# Altium PCB PCB2.PcbDoc
Units mm, origin at the board's own origin, x right, y up, seen from the top; angles counter-clockwise.
Board outline 66 x 55 mm, 2 copper layers (Top Layer, Bottom Layer); 27 components, 41 nets, 135 pads, 0 vias.
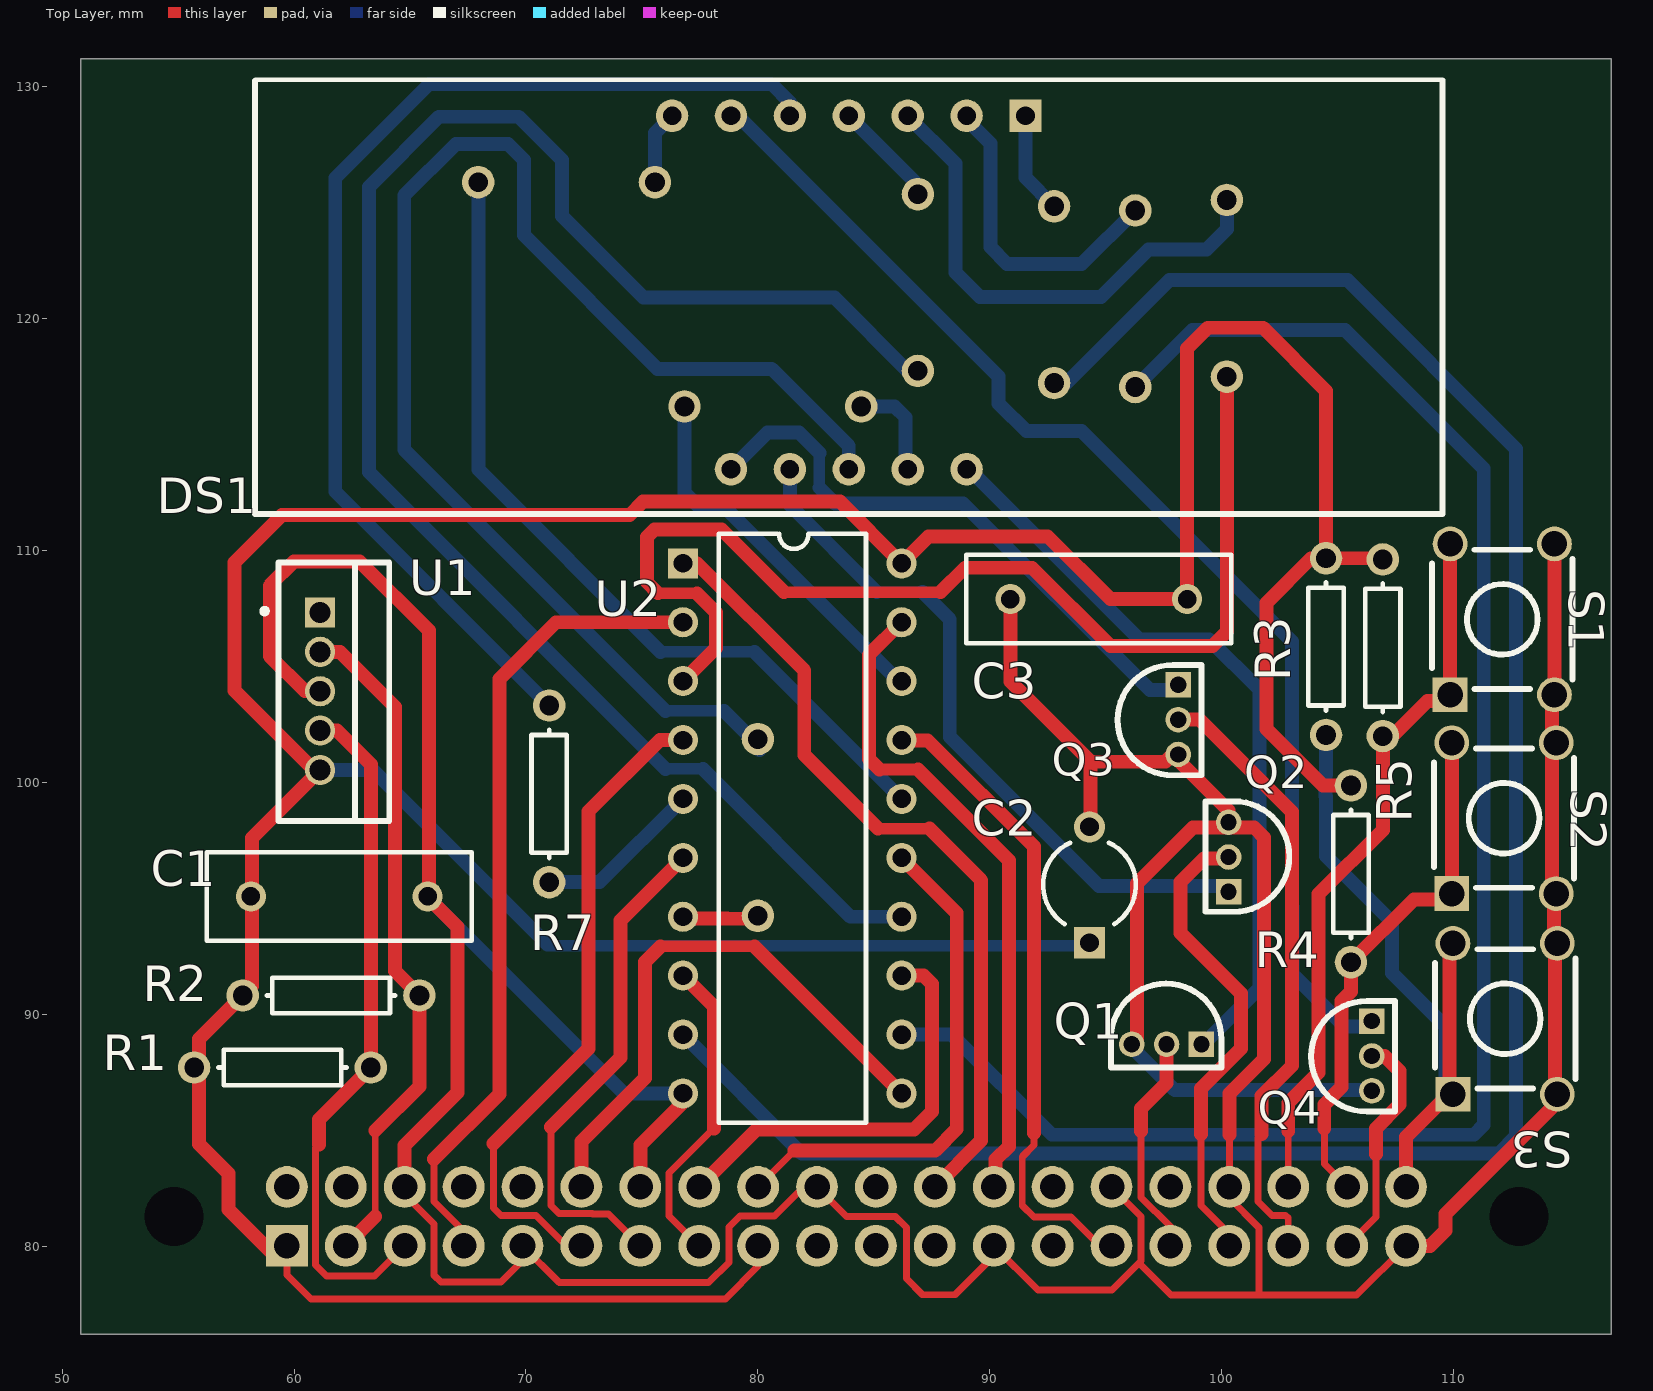
[diagram p0: Top Layer view]
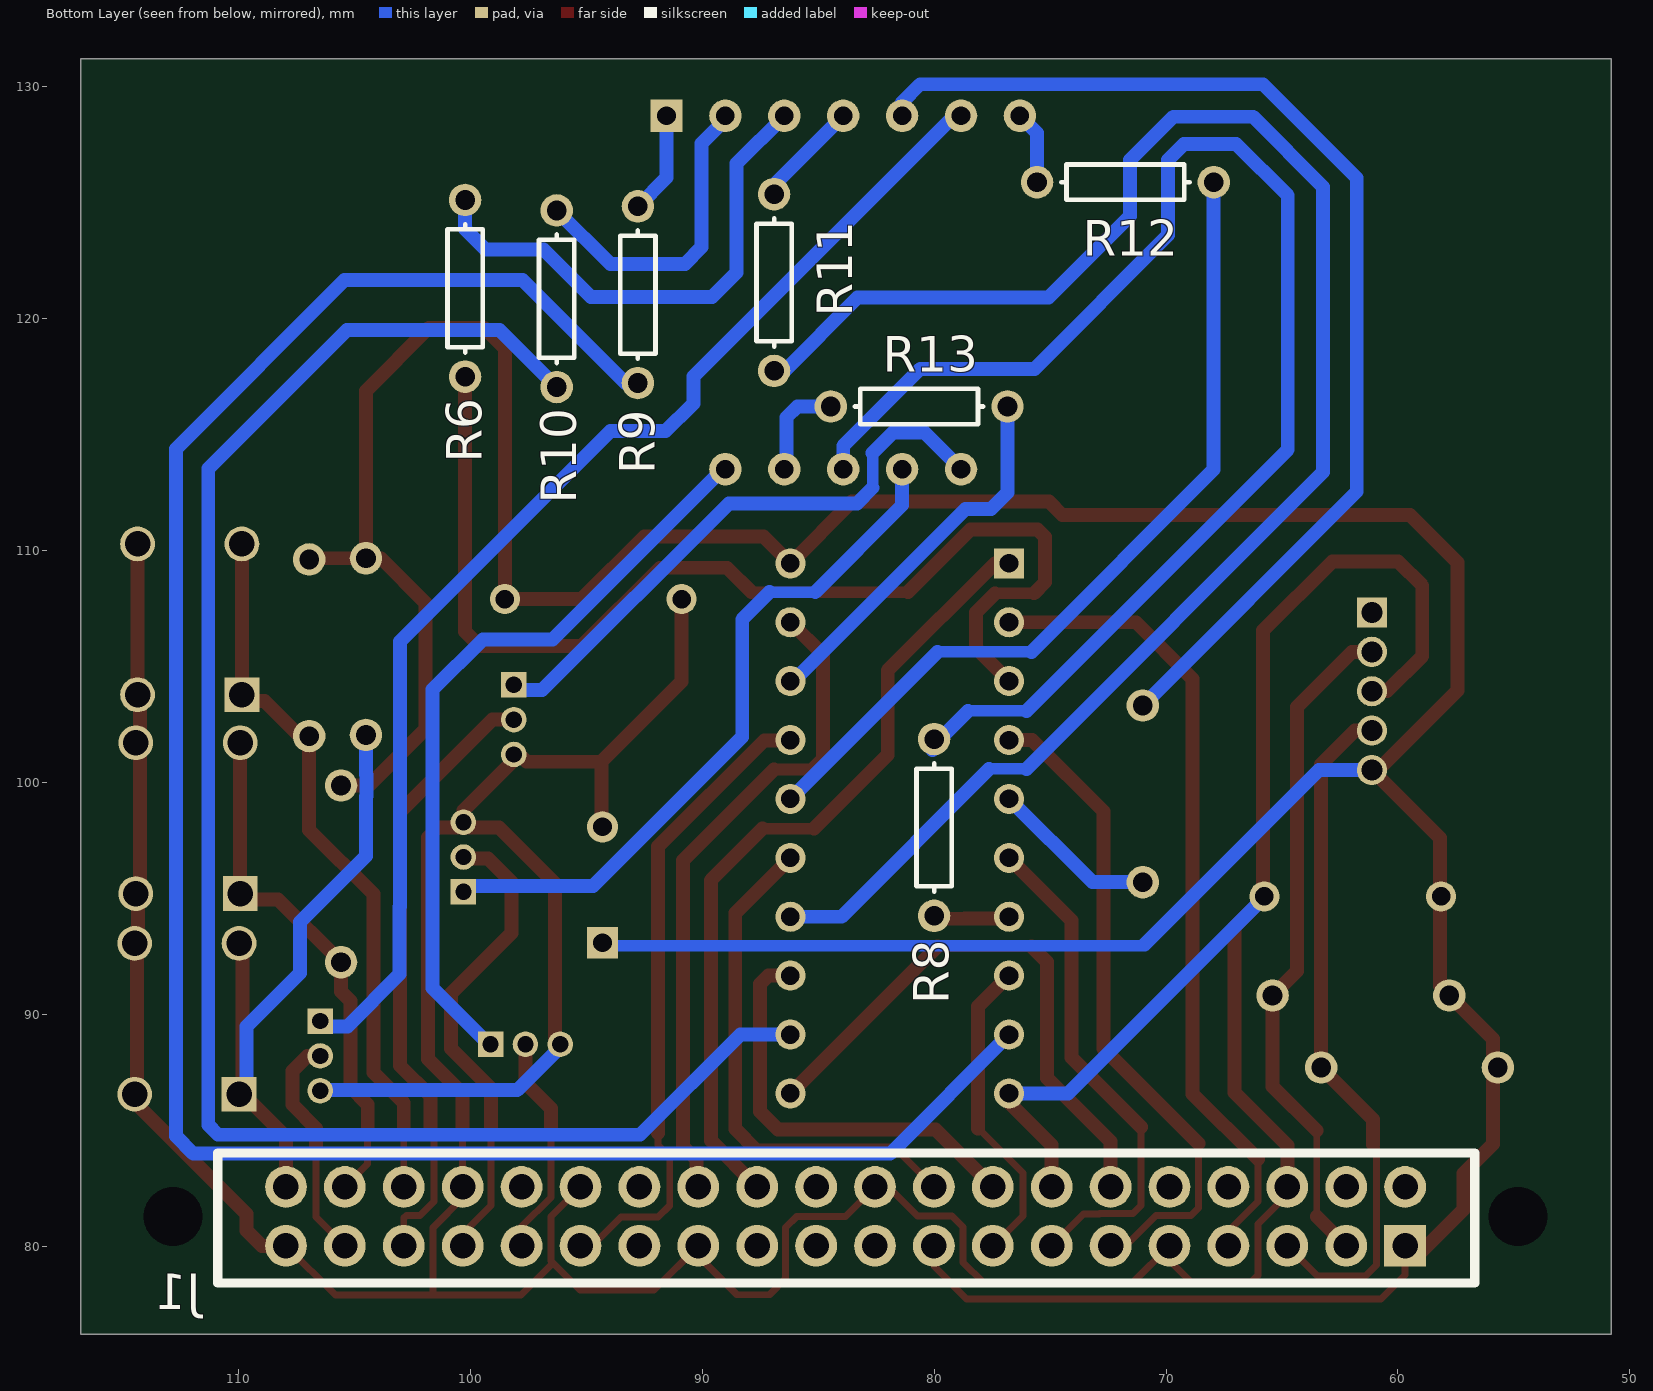
[diagram p1: Bottom Layer view, seen from below]

## Layer stack, top to bottom
Top Solder: solder mask 0.0102, Solder Resist, Dk 3.5
Top Layer: signal copper 0.0356
Dielectric 1: dielectric 0.32, FR-4, Dk 4.8
Bottom Layer: signal copper 0.0356
Bottom Solder: solder mask 0.0102, Solder Resist, Dk 3.5

## Board outline
50.8,76.2 116.8,76.2 116.8,131.2 50.8,131.2

## Design rules (kind name [scope] priority, off if disabled: settings)
Clearance [All] p1: gap=0.3 except(0.1: Arc-Arc Arc-Track Arc-SMDPad Arc-THPad Arc-Via Track-Track Track-SMDPad Track-THPad Track-Via)
MinimumSolderMaskSliver [All] p1 off: minsoldermaskwidth=0.254
PolygonConnect [All] p1: connectstyle=Relief reliefconductorwidth=0.254 reliefentries=4 polygonreliefangle="90 Angle" airgapwidth=0.254
RoutingVias [All] p1: holewidth=0.8 width=1.6 viastyle="Through Hole" minholewidth=0.711 minwidth=1.27 maxholewidth=0.711 maxwidth=1.27
SilkToSilkClearance [All] p1 off: silktosilkclearance=0.254
SilkToSolderMaskClearance [IsPad] p1 off: minsilkscreentomaskgap=0.254 clearancetoexposedcopper=TRUE
SolderMaskExpansion [All] p1: expansion=0.102
Width [All] p1: maxlimit=1.2 minlimit=0.3 preferedwidth=0.6
27 further rules are at their usual default settings.

## Components (designator, comment, footprint, x,y, rotation, side; value= is the part's Value field where it differs from the comment)
C1 "Cap" RAD-0.3 61.95,95.075 r180 top
C2 "Cap2" CAPR5-4X5 94.3,95.575 r90 top
C3 "Cap" RAD-0.3 94.7,107.9 r0 top
DS1 "HDSPB03E" DISPLAY 83.92,121.12 r270 top locked
J1 "HEADER40" DIP40 59.69,80.01 r90 bottom locked
Q1 "BS170" MOSFET 97.625,89.2 r180 top
Q2 "BS170" MOSFET 100.8,96.775 r90 top
Q3 "BS170" MOSFET 97.625,102.7 r270 top
Q4 "BS170" MOSFET 105.975,88.2 r270 top
R1 "Res1" AXIAL-0.3 59.5,87.7 r0 top
R2 "Res1" AXIAL-0.3 61.595,90.805 r180 top
R3 "Res1" AXIAL-0.3 104.5,105.85 r90 top
R4 "Res1" AXIAL-0.3 105.575,96.05 r90 top
R5 "Res1" AXIAL-0.3 106.95,105.8 r90 top
R6 "Res1" AXIAL-0.3 100.225,121.3 r270 bottom
R7 "Res1" AXIAL-0.3 71,99.5 r270 top
R8 "Res1" AXIAL-0.3 80,98.05 r270 bottom
R9 "Res1" AXIAL-0.3 92.775,121.025 r270 bottom
R10 "Res1" AXIAL-0.3 96.275,120.85 r270 bottom
R11 "Res1" AXIAL-0.3 86.9,121.55 r270 bottom
R12 "Res1" AXIAL-0.3 71.75,125.875 r180 bottom
R13 "Res1" AXIAL-0.3 80.645,116.205 r180 bottom
S1 "FSM4JAH" SPST 112.1,107.025 r180 top
S2 "FSM4JAH" SPST 112.175,98.45 r180 top
S3 "FSM4JAH" SPST 112.225,89.8 r180 top
U1 "TC74" T0220 61.125,103.925 r270 top
U2 "SN74AC241N" SN74 81.485,98.04 r0 top locked

## Footprints (in the part's own frame and the unit in brackets; to place one, negate y for a bottom-side part, rotate by r counter-clockwise, add the part's x,y. Pads: shape width x height; smd on the part's side, far side on the other; paste and mask are expansions set on the pad)
AXIAL-0.3 [mm] "Axial Device, Thru-Hole; 2 Leads; 0.3 in Pin Spacing"
  round 1.4 hole 0.85: 1(-3.81,0) 2(3.81,0)
  silkscreen extent -2.77,-0.76 2.77,0.76
CAPR5-4X5 [mm] "Capacitor; 2 Leads"
  rect 1.35x1.35 hole 0.8: 1(-2.5,0)
  round 1.35 hole 0.8: 2(2.5,0)
  silkscreen extent -1.69,-2 1.82,2
DIP40 [mm]
  rect 1.8x1.8 hole 1.1: 1(0,0)
  round 1.8 hole 1.1: 2(2.54,0) 3(0,2.54) 4(2.54,2.54) 5(0,5.08) 6(2.54,5.08) 7(0,7.62) 8(2.54,7.62) 9(0,10.16) 10(2.54,10.16) 11(0,12.7) 12(2.54,12.7) 13(0,15.24) 14(2.54,15.24) 15(0,17.78) 16(2.54,17.78) 17(0,20.32) 18(2.54,20.32) 19(0,22.86) 20(2.54,22.86) 21(0,25.4) 22(2.54,25.4) 23(0,27.94) 24(2.54,27.94) 25(0,30.48) 26(2.54,30.48) 27(0,33.02) 28(2.54,33.02) 29(0,35.56) 30(2.54,35.56) 31(0,38.1) 32(2.54,38.1) 33(0,40.64) 34(2.54,40.64) 35(0,43.18) 36(2.54,43.18) 37(0,45.72) 38(2.54,45.72) 39(0,48.26) 40(2.54,48.26)
  silkscreen extent -1.6,-3 4,51.2
DISPLAY [mm]
  rect 1.4x1.4 hole 0.8: 1(-7.62,7.62)
  round 1.4 hole 0.8: 2(-7.62,5.08) 3(-7.62,2.54) 4(-7.62,0) 5(-7.62,-2.54) 6(-7.62,-5.08) 7(-7.62,-7.62) 8(7.62,-5.08) 9(7.62,-2.54) 10(7.62,0) 11(7.62,2.54) 12(7.62,5.08)
  silkscreen extent -9.18,-25.6 9.56,25.6
MOSFET [mm] "TO-92"
  rect 1.1x1.1 hole 0.7: D(-1.5,0.5)
  round 1.1 hole 0.7: G(0,0.5) S(1.5,0.5)
  silkscreen extent -2.36,-2.12 2.4,1.5
RAD-0.3 [mm] "Radial Cap, Thru-Hole; 2 Leads; 0.3 in Pin Spacing"
  round 1.3 hole 0.8: 1(-3.81,0) 2(3.81,0)
  silkscreen extent -5.71,-1.91 5.71,1.91
SN74 [mm]
  rect 1.3x1.3 hole 0.8: 1(-4.715,11.4)
  round 1.3 hole 0.8: 2(-4.715,8.86) 3(-4.715,6.32) 4(-4.715,3.78) 5(-4.715,1.24) 6(-4.715,-1.3) 7(-4.715,-3.84) 8(-4.715,-6.38) 9(-4.715,-8.92) 10(-4.715,-11.46) 11(4.715,-11.46) 12(4.715,-8.92) 13(4.715,-6.38) 14(4.715,-3.84) 15(4.715,-1.3) 16(4.715,1.24) 17(4.715,3.78) 18(4.715,6.32) 19(4.715,8.86) 20(4.715,11.4)
  silkscreen extent -3.17,-12.73 3.17,12.67
SPST [mm]
  rect 1.5x1.5 hole 1.1: 1(2.25,3.25)
  round 1.5 hole 1.1: 1(2.25,-3.25) 2(-2.25,3.25) 2(-2.25,-3.25)
  silkscreen extent -3.03,-3 3.03,3
T0220 [mm]
  rect 1.3x1.3 hole 0.9: 1(-3.4,0)
  round 1.3 hole 0.9: 2(-1.7,0) 3(0,0) 4(1.7,0) 5(3.4,0)
  silkscreen extent -5.55,-2.5 5.6,2.98

## Part data
C1 C2 C3: "Capacitor"
DS1: "Display"
J1: "Header"
Q1 Q2 Q3 Q4: "Mosfet"
R1 R2 R3 R4 R5 R6 R7 R8 R9 R10 R11 R12 R13: "Resistor"
S1 S2 S3: "Switch"
U1: "Sensor"
U2: "Driver"

## Free pads (board coordinates)
  round 1.524 hole 2.54: ""(54.82,81.28) ""(112.82,81.28)

## Nets (pads, with @x,y where several pads share a name; then routed paths per layer and width w, separated by ;. In a path a pad name is that pad's centre, name@x,y a point inside that pad or via, vN(x,y) a via of type N, cw(c..) or ccw(c..) an arc to the next point about the centre after c; other vN are vias at no path point)
C1: DS1.12 Q1.D | length 33.1
  Bottom Layer w0.6: DS1.12@89.1,113.5 96.45,106.15 99.45,106.15 99.463,106.163 101.625,104 101.625,91.125 99.2,88.7 Q1.D Q1.D@98.895,88.7
C2: DS1.9 Q2.D | length 29.8
  Bottom Layer w0.5: 85.125,108.2 87.1,108.2
  Bottom Layer w0.6: DS1.9 81.38,111.945 85.125,108.2 ; 87.1,108.2 88.275,107.025 88.275,101.95 94.7,95.525 Q2.D@99.82,95.525
C3: DS1.8 Q3.D | length 25.4
  Bottom Layer w0.5: 82.65,112.7 82.65,114.2
  Bottom Layer w0.6: DS1.8 80.415,115.075 81.775,115.075 82.65,114.2 ; 82.65,112.7 83.325,112.025 88.85,112.025 96.905,103.97 Q3.D@98.125,103.97
C4: DS1.6 Q4.D | length 53
  Bottom Layer w0.6: DS1.6 79.135,128.74 90.375,117.5 90.375,116.338 90.45,116.275 91.575,115.15 93.95,115.15 103.025,106.075 103.025,94.65 103.05,94.625 103.05,91.725 105.305,89.47 Q4.D@106.475,89.47
CLK: J1.5 R1.2 U1.4 | length 30
  Top Layer w0.3: 61.075,84.375 60.925,84.225 60.925,79.175 61.4,78.7 63.46,78.7 J1.5
  Top Layer w0.6: 61.075,84.375 61.075,85.465 R1.2 63.31,100.765 61.85,102.225 U1.4
DA: R13.2 U2.18 | length 16.4
  Bottom Layer w0.6: R13.2 76.835,112.49 77.546,111.779 78.646,111.779 86.065,104.36 U2.18
DATA: J1.3 R2.1 U1.2 | length 29.2
  Top Layer w0.3: 63.5,81.28 63.5,84.975
  Top Layer w0.6: U1.2 61.975,105.625 64.35,103.25 64.35,91.86 R2.1 65.405,86.88 63.5,84.975 ; J1.3 63.5,81.28
DB: R12.2 U2.16 | length 36.5
  Bottom Layer w0.5: 75.8,105.625 79.855,105.625
  Bottom Layer w0.6: R12.2@67.945,125.875 67.945,113.48 75.8,105.625 ; 79.855,105.625 U2.16
DC: R11.2 U2.14 | length 74.1
  Bottom Layer w0.5: 76.025,100.575 77.625,100.575
  Bottom Layer w0.6: 76.025,100.575 63.225,113.375 63.225,125.675 66.25,128.7 69.675,128.7 71.55,126.825 71.55,124.425 75.075,120.9 83.3,120.9 86.5,117.7 R11.2@86.9,117.7 ; 77.625,100.575 84,94.2 U2.14
DD: R10.2 U2.12 | length 73.6
  Bottom Layer w0.6: U2.12@86.45,89.125 88.35,89.125 92.675,84.8 110.875,84.8 111.3,85.225 111.3,113.525 105.325,119.5 98.735,119.5 R10.2
DDP: R6.2 U2.3 | length 48.4
  Top Layer w0.5: 75.7,108.15 77.375,108.15 ; 81.125,108.2 87.875,108.2
  Top Layer w0.6: 75.7,108.15 75.225,108.625 75.225,110.575 75.55,110.9 78.425,110.9 81.125,108.2 ; U2.3 78.2,105.79 78.2,107.325 77.375,108.15 ; 87.875,108.2 88.925,109.25 91.825,109.25 95.2,105.875 99.6,105.875 100.225,106.5 R6.2
DE: R9.2 U2.9 | length 92.8
  Bottom Layer w0.6: U2.9 81.89,84 111.95,84 112.7,84.75 112.7,114.375 105.425,121.65 97.75,121.65 93.315,117.215 R9.2
DF: R8.2 U2.7 | length 2.8
  Top Layer w0.6: U2.7@77.265,94.125 78.665,94.125 R8.2@80.075,94.115
DG: R7.2 U2.5 | length 7.3
  Bottom Layer w0.6: R7.2 73.18,95.69 U2.5
EA: J1.7 U2.2 | length 35.1
  Top Layer w0.3: 66.04,83.75 66.04,81.915 67.31,80.645 J1.7
  Top Layer w0.6: 66.04,83.75 68.85,86.56 68.85,104.45 71.3,106.9 U2.2
EB: J1.11 U2.4 | length 29.2
  Top Layer w0.3: 68.6,84.425 68.6,81.645 68.92,81.325 70.425,81.325 71.74,80.01 J1.11 J1.11@72.39,80.565
  Top Layer w0.6: 68.6,84.425 72.7,88.525 72.7,98.75 75.77,101.82 U2.4
EC: J1.13 U2.6 | length 22.4
  Top Layer w0.3: 71.075,85.125 71.075,81.75 71.425,81.4 72.866,81.4 72.876,81.39 73.55,81.39 J1.13 J1.13@74.93,80.295 ; U2.6 U2.6@77.01,96.74
  Top Layer w0.6: 71.075,85.125 74.075,88.125 74.075,94.045 U2.6
ED: J1.15 U2.8 | length 13.4
  Top Layer w0.3: J1.15 76.175,81.305 76.175,83.15 78.025,85
  Top Layer w0.6: U2.8 78.1,90.33 78.1,85.075
EDP: J1.29 U2.17 | length 28.7
  Top Layer w0.3: U2.17 U2.17@86.38,101.82 ; 91.9,84.875 91.9,84.35 91.4,83.85 91.4,81.75 91.9,81.25 93.5,81.25 95.25,79.5 J1.29
  Top Layer w0.6: U2.17@86.22,101.8 87.325,101.8 91.9,97.225 91.9,84.875
EE: J1.12 U2.11 | length 25.3
  Top Layer w0.3: J1.12@72.39,82.39 J1.12 ; U2.11 U2.11@86.4,86.38
  Top Layer w0.5: 75.8,92.925 79.855,92.925
  Top Layer w0.6: J1.12 72.39,84.515 75.125,87.25 75.125,92.25 75.8,92.925 ; 79.855,92.925 U2.11
EF: J1.16 U2.13 | length 18.6
  Top Layer w0.3: J1.16 J1.16@77.75,82.55
  Top Layer w0.6: J1.16 79.945,85.025 86.725,85.025 87.5,85.8 87.5,91.3 87.14,91.66 U2.13
EG: J1.18 U2.15 | length 22.3
  Top Layer w0.3: J1.18 81.585,84.125
  Top Layer w0.6: 81.585,84.125 87.65,84.125 88.575,85.05 88.575,94.365 U2.15
EN1: J1.31 Q1.G | length 9.7
  Top Layer w0.3: 96.525,84.95 96.525,82.1 97.79,80.835 J1.31
  Top Layer w0.6: 96.525,84.95 96.525,85.925 97.625,87.025 Q1.G
EN2: J1.33 Q2.G | length 20.5
  Top Layer w0.3: 99.1,84.825 99.1,81.75 100.33,80.52 J1.33
  Top Layer w0.6: 99.1,84.825 99.1,86.8 100.825,88.525 100.825,90.9 98.225,93.5 98.225,95.7 99.245,96.72 100.245,96.72 Q2.G
EN3: J1.35 Q3.G | length 26.7
  Top Layer w0.3: 101.72,84.825 101.575,84.68 101.575,81.925 102.175,81.325 102.75,81.325 102.87,81.205 J1.35
  Top Layer w0.6: Q3.G 99.05,102.7 103.025,98.725 103.025,87.775 101.72,86.47 101.72,84.825
EN4: J1.37 Q4.G | length 9.9
  Top Layer w0.3: J1.37 106.65,81.25 106.65,83.975
  Top Layer w0.6: Q4.G 107.025,88.2 107.675,87.55 107.675,86.1 106.65,85.075 106.65,83.975
GND: C1.1 C2.2 C3.1 J1.6 J1.9 J1.14 J1.20 J1.25 J1.30 J1.34 J1.39 Q1.S Q2.S Q3.S Q4.S S1.2 S2.2 S3.2 U1.3 U2.10 | length 218.1
  Top Layer w0.3: J1.6 64.77,82.23 66.04,80.96 66.04,78.74 66.33,78.45 68.925,78.45 69.85,79.375 J1.9 71.435,78.425 77.875,78.425 78.75,79.3 78.75,80.825 79.225,81.3 80.725,81.3 81.9,82.475 81.9,82.55 J1.20 83.825,81.275 85.925,81.275 86.4,80.8 86.4,78.6 87.1,77.9 88.5,77.9 90.17,79.57 J1.25 92.08,78.1 95.275,78.1 96.525,79.35 96.525,81.275 J1.30 ; 96.5,79.2 97.82,77.88 101.6,77.88 ; 100.33,84.8 J1.34 100.33,82.07 101.6,80.8 101.6,77.88 ; J1.39 105.82,77.88 101.6,77.88
  Top Layer w0.6: U1.3 60.475,103.925 58.95,105.45 58.95,108.475 60,109.525 62.825,109.525 65.81,106.54 C1.1@65.81,95.1 ; J1.6 64.77,84.345 67.05,86.625 67.05,93.75 C1.1@66.075,94.725 ; J1.14 74.93,84.355 76.77,86.195 U2.10 ; C3.1 90.89,104.335 94.34,100.885 ; C2.2@94.34,98.34 94.34,100.885 ; Q1.S@96.355,88.7 96.355,95.63 98.77,98.045 Q2.S@100.3,98.045 ; 100.33,84.8 100.33,86.58 101.825,88.075 101.825,97.625 101.405,98.045 Q2.S@100.3,98.045 ; J1.39 108.985,80.01 109.65,80.675 109.65,81.375 114.375,86.1 114.375,92.8 S3.2@114.125,93.05 ; S2.2@114.25,95.2 114.25,101.7 S1.2@114.25,103.675 ; S3.2@114.325,93.05 S2.2@114.325,95.125 ; S1.2@114.35,103.775 S1.2@114.35,110.275 ; 94.34,100.885 97.58,100.885 98.125,101.43 Q3.S 98.125,100.95 100.3,98.775 Q2.S Q2.S@100.3,98.045
  Bottom Layer w0.6: C1.1@65.725,95.075 74.22,86.58 U2.10 ; Q1.S@96.2,88.5 97.975,86.725 Q4.S@106.1,86.725
NetDS1_1: DS1.1 R9.1 | length 4.4
  Bottom Layer w0.6: DS1.1 91.54,126.07 R9.1
NetDS1_2: DS1.2 R10.1 | length 13.2
  Bottom Layer w0.6: DS1.2@89.175,128.4 90.025,127.55 90.025,123.075 90.75,122.35 93.965,122.35 R10.1
NetDS1_3: DS1.3 R6.1 | length 22.4
  Bottom Layer w0.6: DS1.3 88.525,126.675 88.525,121.975 89.575,120.925 94.8,120.925 96.85,122.975 99.35,122.975 100.225,123.85 R6.1 R6.1@100.225,125.325
NetDS1_4: DS1.4 R11.1 | length 4.6
  Bottom Layer w0.6: DS1.4 86.9,125.76 R11.1
NetDS1_5: DS1.5 R7.1 | length 48.7
  Bottom Layer w0.6: R7.1 61.775,112.535 61.775,126.05 65.825,130.1 80.6,130.1 81.38,129.32 DS1.5
NetDS1_7: DS1.7 R12.1 | length 2.9
  Bottom Layer w0.6: R12.1@75.565,126.125 75.565,128.005 DS1.7
NetDS1_10: DS1.10 R8.1 | length 60.1
  Bottom Layer w0.5: 76.025,103.075 78.535,103.075
  Bottom Layer w0.6: 76.025,103.075 64.75,114.35 64.75,125.3 66.975,127.525 69.225,127.525 69.909,126.841 69.909,123.591 75.675,117.825 80.6,117.825 83.92,114.505 DS1.10 ; 78.535,103.075 80.075,101.535 R8.1@80.075,101.38
NetDS1_11: DS1.11 R13.1 | length 4.4
  Bottom Layer w0.6: R13.1 85.895,116.205 86.36,115.74 86.36,113.6 DS1.11
OE1: J1.24 U2.1 | length 34.7
  Top Layer w0.5: 85.175,98 87.4,98
  Top Layer w0.6: U2.1 77.385,109.44 82,104.825 82,101.175 85.175,98 ; 87.4,98 89.625,95.775 89.625,84.545 J1.24
OE2: J1.26 U2.19 | length 28.6
  Top Layer w0.3: U2.19@86,106.9 U2.19
  Top Layer w0.5: 85.25,100.55 86.9,100.55
  Top Layer w0.6: 85.25,100.55 84.8,101 84.8,105.5 U2.19 ; 86.9,100.55 90.825,96.625 90.825,84.3 90.25,83.725 J1.26@90.25,82.95 ; J1.26@90.02,82.55 J1.26
S1: J1.36 R5.1 S1.1 | length 30.8
  Top Layer w0.3: J1.36 102.87,84.95
  Top Layer w0.6: 102.87,84.95 102.87,86.17 104.175,87.475 104.175,95.175 106.95,97.95 R5.1 107.365,101.99 108.875,103.5 S1.1@109.525,103.5 ; S1.1@109.85,103.775 S1.1@109.85,110.275
S2: J1.38 R4.1 S2.1 | length 22.9
  Top Layer w0.3: 104.425,85.075 104.425,83.535 J1.38
  Top Layer w0.6: 104.425,85.075 104.425,86.1 105.175,86.85 105.175,90.575 105.575,90.975 R4.1 108.285,94.95 109.925,94.95 109.925,101.525 S2.1@109.75,101.7
S3: J1.40 R3.1 S3.1 | length 29.3
  Top Layer w0.3: J1.40 J1.40@108.3,82.9
  Top Layer w0.6: J1.40 107.95,84.7 S3.1@109.65,86.4 ; S3.1@109.825,86.55 S3.1@109.825,93.05
  Bottom Layer w0.6: R3.1 104.5,100.341 104.475,100.316 104.475,99.404 104.5,99.379 104.5,96.825 107.35,93.975 107.35,91.775 109.65,89.475 S3.1@109.65,86.4
VCC: C1.2 C2.1 C3.2 J1.1 J1.17 R1.1 R2.2 R3.2 R4.2 R5.2 U1.5 U2.20 | length 181.4
  Top Layer w0.3: J1.1 59.69,78.76 60.725,77.725 78.6,77.725 80.01,79.135 J1.17
  Top Layer w0.6: J1.1 59.31,80.01 59.025,79.725 57.175,81.575 57.175,83.125 55.9,84.4 55.9,88.92 R2.2 58.19,91.21 58.19,97.59 U1.5 60.85,100.525 57.425,103.95 57.425,109.475 59.475,111.525 74.475,111.525 75.05,112.1 83.54,112.1 U2.20 87.36,110.6 92.5,110.6 95.2,107.9 C3.2 98.51,118.71 99.4,119.6 101.775,119.6 104.5,116.875 R3.2 ; R4.2 104.365,99.86 101.925,102.3 101.925,107.725 103.86,109.66 R3.2 ; R5.2@106.9,109.66 R3.2
  Bottom Layer w0.5: 70.925,92.95 C2.1@93.975,92.95
  Bottom Layer w0.6: U1.5 63.4,100.525 70.925,93
pads on no net: J1.2 J1.4 J1.8 J1.10 J1.19 J1.21 J1.22 J1.23 J1.27 J1.28 J1.32 U1.1

## Other copper
Top Layer:
  text "Juan Diego Sierra Fernandez  /              & /      Jorge Campos Bell" at 61.15,63.6 h1.52